# Allegro board PSU-B1-1.brd
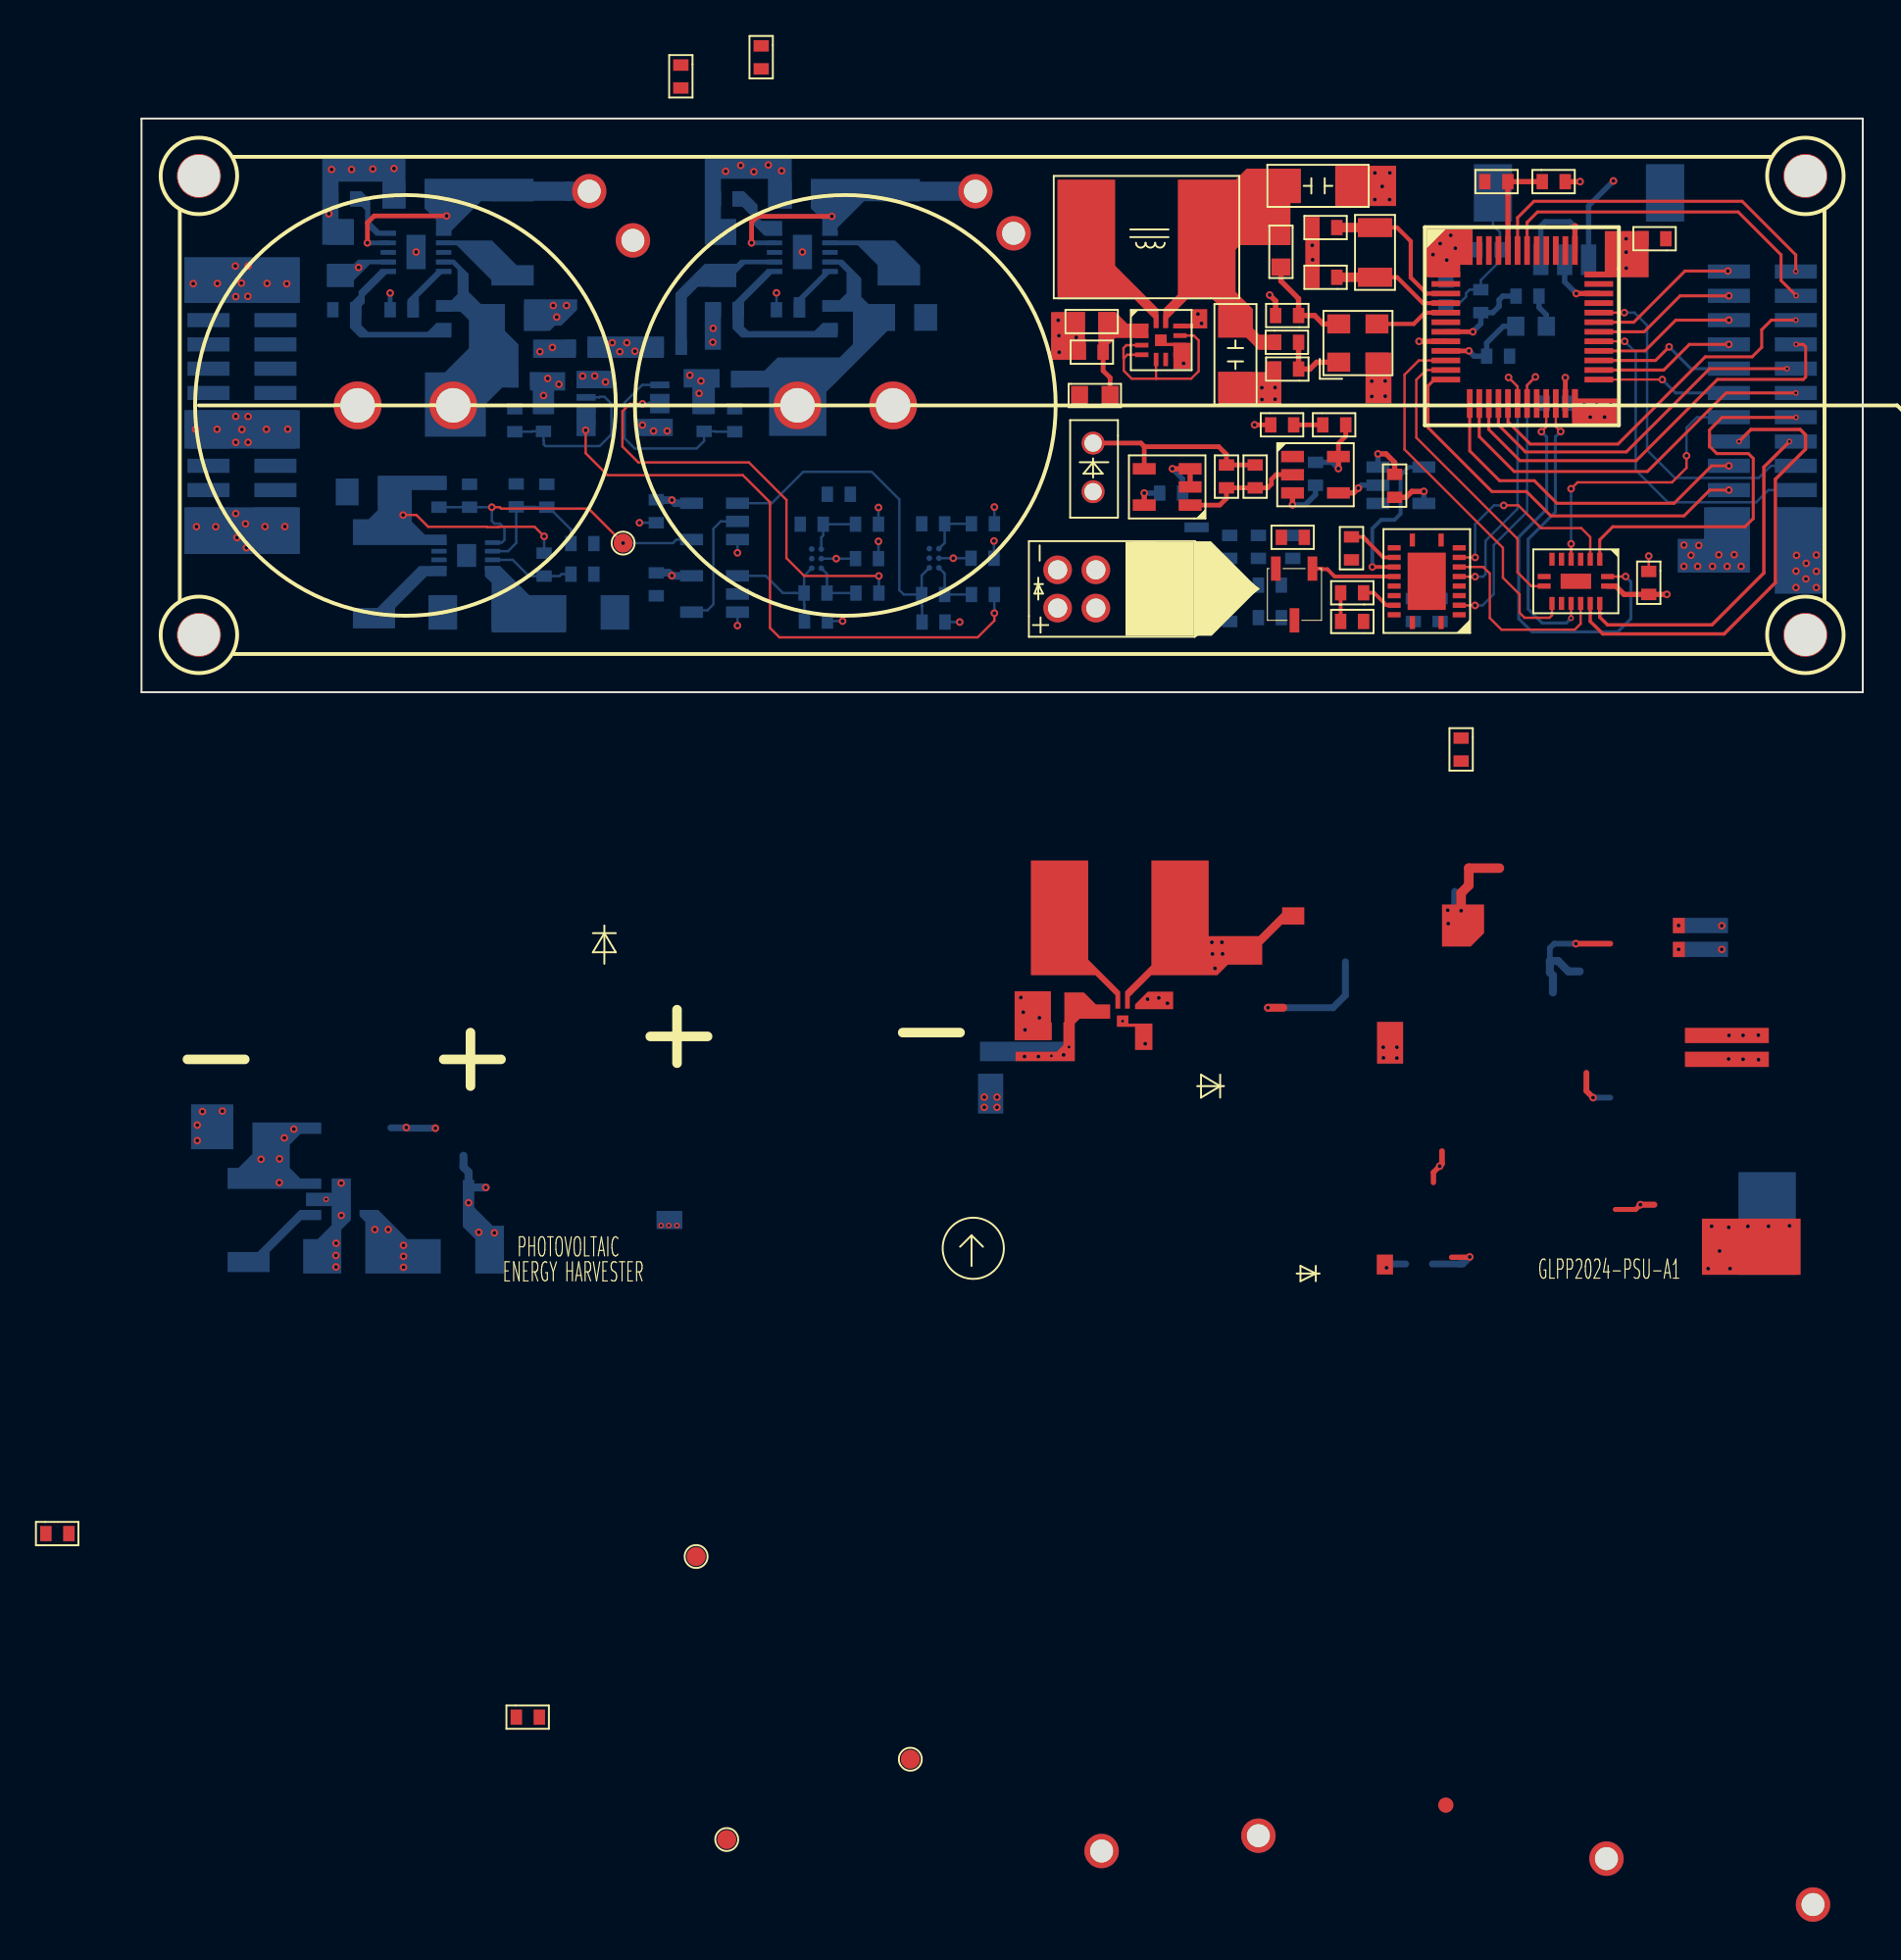
[diagram p0: board, top side]
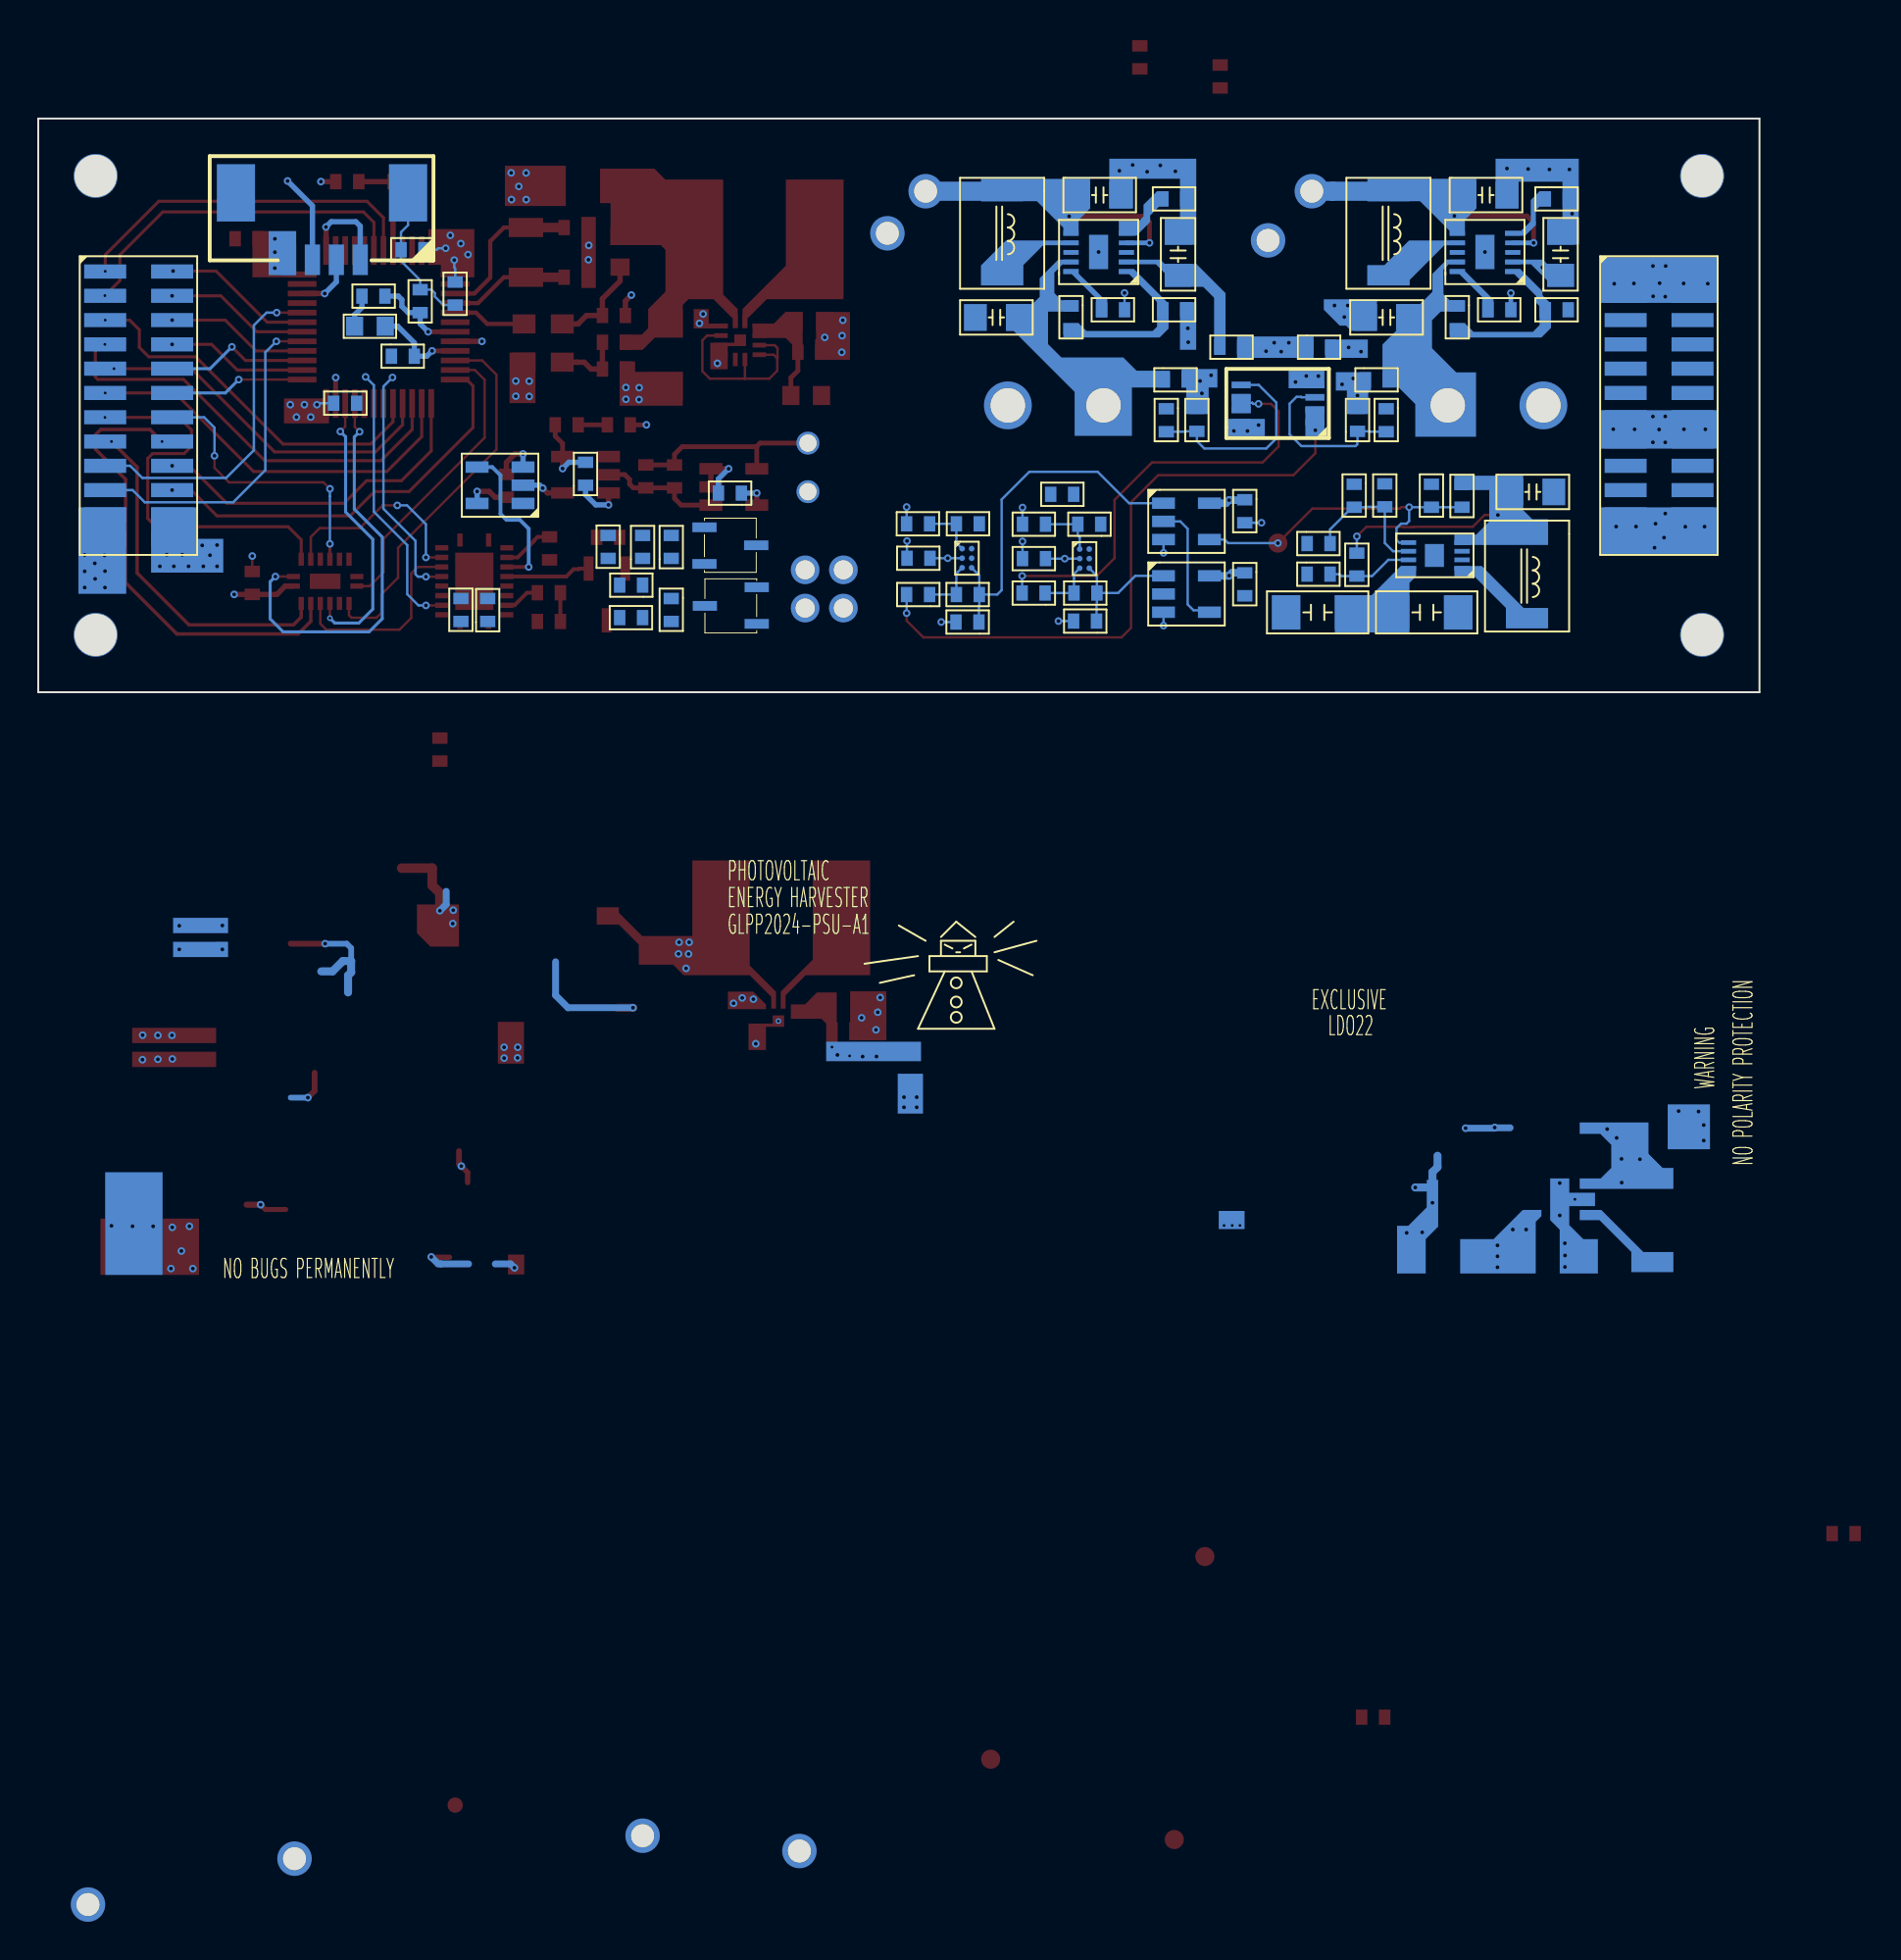
[diagram p1: board, bottom side, seen from below]

Outline 90 x 30 mm; copper layers: TOP, GND, VCC, BOTTOM. Coordinates in mm from the lower left corner of the outline.
Outline path: 0,30 90,30 90,0 0,0 0,30

## Design rules (mm)
constraint set DEFAULT: min track width 0.127
net group N478267: nets N478267 N478271
net group N485107: nets N485107 N485115
net group TX_PWR_EN: nets N478365 TX_PWR_EN
net group VCAP1: nets N478345 VCAP1
net group VCAP2: nets N485373 VCAP2
net group BOOST_EN: nets BOOST_EN N478287 N479043 N490401 N490405 VCAP
net group CHG_FULL: nets CHG_FULL LDO22 N490413 N490465 N490853 N490915 N491089 N491653 UV_SHDN
net group FIBER_TX_3V3: nets FIBER_TX_3V3 N527048 N527198 N527202 N527222
net group P1V8: nets N517140 N518111 N602776 P1V8

## Placement (name value [footprint] x y rotation side)
C1  0.1uF  [C0402]  68.2 20.25 90 bottom
C2  12pF  [C0402]  62.5 24.3 180 top
C3  33uF  [C1206]  63.17 26.48 180 top
C4  12pF  [C0402]  62.5 21.7 180 top
C5  0.1uF  [C0402]  60.5 19.7 180 top
C6  10uF  [C0603]  50.48 19.38 180 top
C7  0.1uF  [C0402]  50.28 17.78 180 top
C8  4.2V/1F  [SUC_THR_5D0_21D5]  13.8 15 180 top
C9  4.2V/1F  [SUC_THR_5D0_21D5]  36.8 15 0 top
C10  DNI  [C0402]  58.23 10.69 90 top
C11  0.1uF  [C0402]  69 -2.4 270 top
C12  0.1uF  [C0402]  78.81 6.32 270 top
C13  0.1uF  [C0402]  71.03 23.14 180 bottom
C14  10uF  [C0805]  35.6 26 180 bottom
C15  10uF  [C0805]  15.4 26 180 bottom
C16  10uF  [C0805]  30.4 21.8 90 bottom
C17  10uF  [C0805]  10.4 21.8 90 bottom
C18  0.1uF  [C0402]  70.03 19.85 90 bottom
C19  0.1uF  [C0402]  79.7 23.72 180 top
C20  1uF  [C0402]  34.4 20 180 bottom
C21  1uF  [C0402]  14.2 20 180 bottom
C22  10uF  [C0805]  38.8 19.6 0 bottom
C23  10uF  [C0805]  18.4 19.6 0 bottom
C24  0.1uF  [C0402]  71.53 17.57 180 bottom
C25  0.1uF  [C0402]  73.35 15.12 0 bottom
C26  0.1uF  [C0402]  65.52 11.39 270 top
C27  0.1uF  [C0402]  61.38 10.82 90 bottom
C28  0.1uF  [C0402]  35.86 10.35 0 bottom
C29  2.2uF  [C0402]  44.59 8.81 180 bottom
C30  10uF  [C0805]  12.95 10.47 180 bottom
C31  33pF  [C0402]  21.19 10.87 270 bottom
C32  0.1uF  [C0402]  53.23 10.41 0 bottom
C33  0.1uF  [C0402]  26.91 10.06 270 bottom
C34  0.1uF  [C0402]  26.91 6.24 270 bottom
C35  2.2uF  [C0402]  38.53 8.79 180 bottom
C36  0.1uF  [C0402]  44.57 7.01 180 bottom
C37  0.1uF  [C0402]  38.53 6.99 180 bottom
C38  0.1uF  [C0402]  67.9 4.9 270 bottom
C39  0.1uF  [C0402]  66.5 3.7 90 bottom
C40  22uF  [C1206]  21.45 4.17 0 bottom
C41  22uF  [C1206]  19.05 4.17 180 bottom
C42  33uF  [C1206]  57.2 16 90 top
D1  GREEN LED  [LED0402]  32.4 33.8 270 top
D2  GREEN LED  [LED0402]  59.04 13.98 0 top
D3  GREEN LED  [LED0402]  63.9 3.7 180 top
D7  LED  [LED0402]  -5 -44 0 top
J2  SIP-1x4  [SMD-1D25-4P-DEG0]  73.16 22.62 0 bottom
J5  CONN-24P  [SMD_CONN_2X12P_1D27]  3.5 22 270 bottom
J6  CONN-24P  [SMD_CONN_2X12P_1D27]  83 22 270 bottom
L1  33uH/1A  [IND_SMD_7D0X6D6]  55.7 23.8 180 top
L2  2.2uH  [L0603]  59.58 23.83 270 top
L3  10uH/1A  [IND_SMD_4D4X4D2]  39.6 26.2 270 bottom
L4  10uH/1A  [IND_SMD_4D4X4D2]  19.4 26.2 270 bottom
L5  2.2uH  [L0603]  73.46 19.14 180 bottom
L6  2.2uH/500mA  [L0603]  49.05 15.52 0 top
L7  4.7uH/1A  [IND_SMD_4D4X4D2]  12.15 8.27 270 bottom
LD1  LaserDiode  [AXIAL_2D0_4P]  47.9 4.4 90 top
NOREF  -  [unnamed]  3 3 0 top
NOREF#2  -  [#2]  0 0 90 top
NOREF#3  -  [unnamed]  3 27 0 top
NOREF#4  -  [unnamed]  87 27 0 top
NOREF#5  -  [#2]  0 30 0 top
NOREF#6  -  [unnamed]  87 3 0 top
PD1  Photodiode  [PD-THR-2P]  49.76 13.03 270 top
Q1  Si2301BDS-HXY  [SOT23-3]  61.7 6.9 180 top
Q2  2SC1815  [SOT23-3]  55.6 9.1 270 bottom
Q3  2SC1815  [SOT23-3]  52 3.1 90 bottom
R1  DNI  [R0402]  28.2 32.8 270 top
R2  DNP  [R0402]  59.3 18.3 0 top
R3  0R  [R0402]  60.5 16.9 180 top
R4  20K  [R0402]  61.77 13.98 0 top
R5  DNI  [R0402]  56.73 10.69 90 top
R6  10K  [R0402]  59.6 8.1 0 top
R7  5.1K  [R0402]  63.27 8.12 270 top
R8  20K  [R0402]  63.9 5.2 180 top
R9  200K  [R0402]  31.2 25.8 180 bottom
R10  200K  [R0402]  11.2 25.8 180 bottom
R11  10K  [R0402]  71.87 20.71 0 bottom
R12  1M  [R0402]  31.2 20 180 bottom
R13  1M  [R0402]  11.2 20 180 bottom
R14  2.26M  [R0402]  36 20.2 270 bottom
R15  2.26M  [R0402]  15.8 20.2 270 bottom
R16  0R  [R0402]  31.12 16.34 180 bottom
R17  0R  [R0402]  20.61 16.34 180 bottom
R18  1M  [R0402]  31.02 14.82 270 bottom
R19  1M  [R0402]  29.42 13.64 90 bottom
R20  1M  [R0402]  21.02 13.64 90 bottom
R21  1M  [R0402]  19.52 14.82 270 bottom
R22  3.3K  [R0402]  40.79 8.81 0 bottom
R23  1M  [R0402]  19.59 9.69 90 bottom
R24  100K  [R0402]  17.15 10.87 270 bottom
R25  DNI  [R0402]  15.55 9.67 90 bottom
R26  22.9K?  [R0402]  34.66 3.72 0 bottom
R27  3.3K  [R0402]  34.44 8.79 0 bottom
R28  378K?  [R0402]  40.81 3.67 0 bottom
R29  562K  [R0402]  23.65 7.77 180 bottom
R30  560  [R0402]  60.2 8.2 270 bottom
R31  510  [R0402]  58.4 7 90 bottom
R32  51  [R0402]  56.9 7 90 bottom
R33  200K  [R0402]  43.39 5.11 0 bottom
R34  998K?  [R0402]  41.99 5.11 180 bottom
R35  DNI  [R0402]  21.05 6.07 90 bottom
R36  100K  [R0402]  23.65 6.17 180 bottom
R37  510  [R0402]  58.4 5.6 0 bottom
R38  3.01K  [R0402]  37.35 5.19 0 bottom
R39  4.99K  [R0402]  35.84 5.19 180 bottom
R40  51  [R0402]  56.9 4.9 270 bottom
R41  510  [R0402]  59.6 3.9 180 bottom
R42  DNP  [R0402]  23.62 18.04 180 bottom
R43  0R  [R0402]  27.02 18.04 0 bottom
R44  0R  [R0402]  73.24 26.7 0 top
R45  DNI  [R0402]  71.44 26.7 180 top
R46  2K  [R0402]  19.6 -53.6 0 top
TP1  Solar Cell V+  [TP_THR_1D8_1D2]  43.6 26.2 180 bottom
TP2  Solar Cell V+  [TP_THR_1D8_1D2]  23.41 26.2 180 bottom
TP3  Solar Cell V-  [TP_THR_1D8_1D2]  45.6 24 180 bottom
TP4  Solar Cell V-  [TP_THR_1D8_1D2]  25.69 23.63 180 bottom
TP7  T POINT S  [TP_SMD_1D0_NP]  29 -45.2 0 top
TP8  T POINT S  [TP_SMD_1D0_NP]  30.6 -60 0 top
TP9  T POINT S  [TP_SMD_1D0_NP]  25.18 7.8 0 top
TP10  T POINT S  [TP_SMD_1D0_NP]  40.2 -55.8 0 top
TP11  T POINT R  [TP_THR_1D8_1D2]  50.2 -60.6 0 top
TP12  T POINT R  [TP_THR_1D8_1D2]  58.4 -59.8 0 top
TP23  T POINT A  [TP_SMD_CIR_0D8_NP]  68.2 -58.2 0 top
TP24  T POINT R  [TP_THR_1D8_1D2]  76.6 -61 0 top
TP25  T POINT R  [TP_THR_1D8_1D2]  87.4 -63.4 0 top
U1  STM32L051C8T6  [LQFP-48]  72.2 19.1 270 top
U2  LTC3336EV#TRPBF  [LQFN-12-2D0X2D0MM]  53.3 18.4 0 top
U3  SN74AHC1G14DBVR  [SOT-23-5]  60.18 12.32 0 top
U4  SN74AHC1G14DBVR  [SOT-23-5]  64.65 9.87 0 bottom
U5  TLV365DBVR  [SOT-23-5]  54.83 9.79 180 top
U6  TMUX1309BQBR  [WQFN-16-3D5X2D5MM]  75 5.8 180 top
U7  TXS0108ERGYR  [VQFN-20]  67.2 5.8 90 top
U8  LTC3105EDD#PBF  [DFN-10]  36 22 90 bottom
U9  LTC3105EDD#PBF  [DFN-10]  15.8 22 90 bottom
U10  ADA4051-2ARMZ  [MSOP-8]  26.86 14.12 90 bottom
U11  ADCMP380-1ACBZ-RL7  [WLCSP-6]  41.69 7.51 180 bottom
U12  ADCMP380-1ACBZ-RL7  [WLCSP-6]  35.54 7.49 180 bottom
U13  SN74LVC1G32DBVR  [SOT-23-5]  31.16 6.09 180 bottom
U14  SN74AUP1G08DBVR  [SOT-23-5]  31.16 9.88 180 bottom
U15  LTC3539EDCB#PBF  [DFN-8]  18.35 6.47 90 bottom
Y1  32.768KHz  [SMD3215-2P]  64.5 24.3 270 top
Y2  32.0MHz_X1G0041710040  [SMD2520-4P]  63.6 18.3 0 top

## Library data of the parts
C1-C7 C10-C13 C19 C25-C27 C32-C34 C38 C39 C42 = CAP NP
C8 C9 C14-C18 C22-C24 C30 = CAP NP: signal model: DEFAULT_CAPACITOR_1e+07pF_2_1
C20 C21 = CAP NP: signal model: DEFAULT_CAPACITOR_1e+06pF_2_1
C28 C36 C37 = CAP NP: signal model: DEFAULT_CAPACITOR_100000pF_2_1
C29 C35 = CAP NP: signal model: DEFAULT_CAPACITOR_2.2e+06pF_2_1
C31 = CAP NP: signal model: DEFAULT_CAPACITOR_33.000000pF_2_1
C40 C41 = CAP NP: signal model: DEFAULT_CAPACITOR_2.2e+07pF_2_1
D1-D3 D7 = LED
J2 = SIP-1x4
J5 J6 = CONN-24P
L1 L2 L6 = INDUCTOR
L3 L4 = INDUCTOR: signal model: DEFAULT_INDUCTOR_10000nH_2_1
L5 L7 = INDUCTOR: signal model: DEFAULT_INDUCTOR_4700nH_2_1
LD1 = LaserDiode
PD1 = Photodiode
Q1 = FH3415A
Q2 Q3 = 2SC1815
R1-R5 R8 R16 R17 R42 R43 R46 = R
R6 R24-R26 R28 R35 R36 = R: signal model: DEFAULT_RESISTOR_10000OHM_2_1
R7 R30 R31 R37 R41 = R: signal model: DEFAULT_RESISTOR_510.000000OHM_2_1
R9 R10 = R: signal model: DEFAULT_RESISTOR_200000OHM_2_1
R11-R13 R18-R21 R23 R44 R45 = R: signal model: DEFAULT_RESISTOR_0.001OHM_2_1
R14 R15 = R: signal model: DEFAULT_RESISTOR_0.00226OHM_2_1
R22 R27 = R: signal model: DEFAULT_RESISTOR_3300OHM_2_1
R29 = R: signal model: DEFAULT_RESISTOR_562000OHM_2_1
R32 R40 = R: signal model: DEFAULT_RESISTOR_40.000000OHM_2_1
R33 R38 = R: signal model: DEFAULT_RESISTOR_36000OHM_2_1
R34 R39 = R: signal model: DEFAULT_RESISTOR_147000OHM_2_1
TP1-TP4 TP23 = T POINT A
TP7-TP10 = T POINT S
TP11 TP12 TP24 TP25 = T POINT R
U1 = STM32L051C8T6
U2 = LTC3336
U3 U4 = SN74AHC1G14DBVR
U5 = TLV365DBVR
U6 = TMUX1309
U7 = TXS0108ERGYR
U8 U9 = LTC3105EDD#PBF
U10 = ADA4051-2ARMZ
U11 U12 = ADCMP380-1ACBZ-RL7
U13 = SN74LVC1G32DBVR
U14 = SN74AUP1G08
U15 = LTC3539EDCB#PBF
Y1 = CRYSTAL
Y2 = OSCILLATOR

## Footprints (pads in the part's own frame, mm; a bottom-side part is the same pattern mirrored in y, then rotated)
AXIAL_2D0_4P
  round 1.5 hole 1: 1(0,0) 2(2,0) 3(0,-2) 4(2,-2)
C0402
  rect 0.6x0.8 smd: 1(0,0) 2(1.2,0)
C0603
  rect 0.9x1 smd: 1(0,0) 2(1.6,0)
C0805
  rect 1.2x1.4 smd: 1(0,0) 2(2.2,0)
C1206
  rect 1.5x1.8 smd: 1(0,0) 2(3.3,0)
DFN-8
  rect 0.25x0.8 smd: 1(0,-2.8) 2(0.45,-2.8) 3(0.9,-2.8) 4(1.35,-2.8) 5(1.35,0) 6(0.9,0) 7(0.45,0) 8(0,0)
  rect 1.2x1 smd: 9(0.676,-1.355)
DFN-10
  rect 0.25x0.8 smd: 1(0,-2.9) 2(0.5,-2.9) 3(1,-2.9) 4(1.5,-2.9) 5(2,-2.9) 6(2,0) 7(1.5,0) 8(1,0) 9(0.5,0) 10(0,0)
  rect 1.8x1 smd: 11(1.022,-1.444)
IND_SMD_4D4X4D2
  rect 1.05x2.2 smd: 1(0,0) 2(4.4,0)
IND_SMD_7D0X6D6
  rect 3x6 smd: 1(0,0) 2(6.3,0)
L0603
  rect 0.9x1 smd: 1(0,0) 2(1.6,0)
LED0402
  rect 0.6x0.8 smd: 1(0,0) 2(1.2,0)
LQFN-12-2D0X2D0MM
  rect 0.7x0.25 smd: 1(-1,0.75) 2(-1,0.25) 3(-1,-0.25) 4(-1,-0.75) 7(1,-0.75) 8(1,-0.25) 9(1,0.25) 10(1,0.75)
  rect 0.25x0.7 smd: 5(-0.25,-1) 6(0.25,-1) 11(0.25,1) 12(-0.25,1)
  rect 0.6x0.6 smd: 13(0,0)
LQFP-48
  rect 0.3x1.5 smd: 1(-2.75,-4) 2(-2.25,-4) 3(-1.75,-4) 4(-1.25,-4) 5(-0.75,-4) 6(-0.25,-4) 7(0.25,-4) 8(0.75,-4) 9(1.25,-4) 10(1.75,-4) 11(2.25,-4) 12(2.75,-4) 25(2.75,4) 26(2.25,4) 27(1.75,4) 28(1.25,4) 29(0.75,4) 30(0.25,4) 31(-0.25,4) 32(-0.75,4) 33(-1.25,4) 34(-1.75,4) 35(-2.25,4) 36(-2.75,4)
  rect 1.5x0.3 smd: 13(4,-2.75) 14(4,-2.25) 15(4,-1.75) 16(4,-1.25) 17(4,-0.75) 18(4,-0.25) 19(4,0.25) 20(4,0.75) 21(4,1.25) 22(4,1.75) 23(4,2.25) 24(4,2.75) 37(-4,2.75) 38(-4,2.25) 39(-4,1.75) 40(-4,1.25) 41(-4,0.75) 42(-4,0.25) 43(-4,-0.25) 44(-4,-0.75) 45(-4,-1.25) 46(-4,-1.75) 47(-4,-2.25) 48(-4,-2.75)
MSOP-8
  rect 0.35x1 smd: 1(-0.001,-3.615) 2(0.649,-3.615) 3(1.299,-3.615) 4(1.949,-3.615) 5(1.949,0.241) 6(1.299,0.241) 7(0.649,0.241) 8(-0.001,0.241)
PD-THR-2P
  round 1.2 hole 0.9: 1(0,0) 2(2.54,0)
R0402
  rect 0.6x0.8 smd: 1(0,0) 2(1.2,0)
SMD2520-4P
  rect 1.2x1 smd: 1(-1,-1.04) 2(1,-1.04) 3(1,0.96) 4(-1,0.96)
SMD3215-2P
  rect 1x1.8 smd: 1(0,0) 2(2.6,0)
SMD-1D25-4P-DEG0
  rect 0.8x1.6 smd: 1(0,0) 2(1.25,0) 3(2.5,0) 4(3.75,0)
  rect 2x3 smd: 5(6.5,-3.5) 6(-2.5,-3.5)
SMD_CONN_2X12P_1D27
  rect 0.74x2.2 smd: 1(0,-3.5) 2(1.27,-3.5) 3(2.54,-3.5) 4(3.81,-3.5) 5(5.08,-3.5) 6(6.35,-3.5) 7(7.62,-3.5) 8(8.89,-3.5) 9(10.16,-3.5) 10(11.43,-3.5) 11(12.7,-3.5) 12(13.97,-3.5) 13(13.97,0) 14(12.7,0) 15(11.43,0) 16(10.16,0) 17(8.89,0) 18(7.62,0) 19(6.35,0) 20(5.08,0) 21(3.81,0) 22(2.54,0) 23(1.27,0) 24(0,0)
SOT23-3
  rect 0.51x1.27 smd: 1(0.476,0.434) 2(2.391,0.434) 3(1.415,3.142)
SOT-23-5
  rect 1.2x0.6 smd: 1(0,0) 2(0,-0.95) 3(0,-1.9) 4(2.4,-1.9) 5(2.4,0)
SUC_THR_5D0_21D5
  round 2.5 hole 1.8: 1(-2.5,0) 2(2.5,0)
TP_SMD_1D0_NP
  round 1 smd: 1(0,0)
TP_SMD_CIR_0D8_NP
  round 0.8 smd: 1(0,0)
TP_THR_1D8_1D2
  round 1.8 hole 1.2: 1(0,0)
unnamed
  round 2.3 hole 2.2 unplated: (0,0)
VQFN-20
  rect 0.68x0.28 smd: 1(-2.157,-0.75) 10(2.158,-0.75) 11(2.158,0.75) 20(-2.157,0.75)
  rect 0.28x0.68 smd: 2(-1.75,-1.7) 3(-1.25,-1.7) 4(-0.75,-1.7) 5(-0.25,-1.7) 6(0.25,-1.7) 7(0.75,-1.7) 8(1.25,-1.7) 9(1.75,-1.7) 12(1.75,1.7) 13(1.25,1.7) 14(0.75,1.7) 15(0.25,1.7) 16(-0.25,1.7) 17(-0.75,1.7) 18(-1.25,1.7) 19(-1.75,1.7)
  rect 3x2 smd: EPAD(0,0)
WLCSP-6
  round 0.3 smd: A1(0,0) A2(0.5,0) B1(0,-0.5) B2(0.5,-0.5) C1(0,-1) C2(0.5,-1)
WQFN-16-3D5X2D5MM
  rect 0.68x0.28 smd: 1(-1.658,-0.25) 8(1.657,-0.25) 9(1.657,0.25) 16(-1.658,0.25)
  rect 0.28x0.68 smd: 2(-1.25,-1.158) 3(-0.75,-1.158) 4(-0.25,-1.158) 5(0.25,-1.158) 6(0.75,-1.158) 7(1.25,-1.158) 10(1.25,1.157) 11(0.75,1.157) 12(0.25,1.157) 13(-0.25,1.157) 14(-0.75,1.157) 15(-1.25,1.157)
  rect 1.6x0.8 smd: EPAD(0,0)

## Nets
GND: C1.1 C2.2 C3.1 C4.2 C5.2 C6.2 C7.2 C8.2 C9.2 C11.1 C12.1 C13.1 C14.2 C15.2 C16.2 C17.2 C18.2 C19.1 C20.2 C21.2 C22.2 C23.2 C24.1 C25.1 C26.1 C27.1 C28.2 C29.1 C30.2 C32.2 C33.2 C34.2 C35.1 C36.1 C37.1 C38.1 C39.2 C40.2 C41.2 C42.1 D1.1(CATHODE) D2.1(CATHODE) D3.1(CATHODE) D7.1(CATHODE) J2.3 J2.5 J2.6 J5.7 J5.8 J5.17 J5.18 J6.11 J6.12 PD1.2 R3.2 R9.2 R10.2 R12.2 R13.2 R18.1 R21.1 R24.1 R29.1 R30.2 R32.2 R36.1 R41.2 R44.2 TP3.1(TP) TP4.1(TP) TP24.1(TP) TP25.1(TP) U1.8(VSSA) U1.23 U1.35 U1.47 U2.7 U2.8 U2.10 U2.13 U3.3 U4.3 U5.2 U5.3 U6.6 U6.8 U6.EPAD U7.11 U7.EPAD U8.3 U8.11 U9.3 U9.11 U10.4(V-) U11.A2 U11.B2 U12.A2 U12.B2 U13.3 U14.3 U15.2 U15.3 U15.9 Y2.2
P1V8: C1.2 C3.2 C11.2 C12.2 C13.2 C19.2 C25.2 C38.2 C42.2 J2.4 L1.1 L2.1 L5.1 R2.1 R11.2 R45.2 U1.1 U1.24 U1.36 U1.48 U2.11(VOUT) U6.16(VDD) U7.2 U7.10
P3V3: C26.2 C27.2 C31.1 C32.1 C39.1 C40.1 C41.1 J5.1 J5.2 J5.11 J5.12 J5.13 J5.14 J5.23 J5.24 J6.13 J6.14 L6.1 Q1.2(S) R4.2 R6.1 R23.2 R46.2 TP11.1(TP) TP12.1(TP) U3.5 U4.5 U5.5 U7.19(VCCB) U15.8(VOUT)
ALL_SHUTDOWN: J5.22 TP23.1(TP)
BOOST_EN: R24.2 R25.1 TP9.1(TP) U14.4(Y) U15.5
CHG_FULL: R26.1 R39.2 TP8.1(TP) U12.C2 U13.1
FIBER_RX: U6.13 U7.7
FIBER_RX_3V3: U4.4(Y) U7.14
FIBER_TX: U6.3 U7.8
FIBER_TX_3V3: R7.1 U7.13
I2C1_SCL: J6.2 U1.42
I2C1_SDA: J6.1 U1.43
IAM_ALIVE: TP7.1(TP) U1.19 U7.3 U13.2
IR_UART_RX: J6.17 U6.14
IR_UART_TX: J6.18 U6.5
LDO22: C28.1 C33.1 C34.1 C36.2 C37.2 R22.1 R26.2 R27.1 R28.2 R42.1 R43.1 U10.8 U11.B1 U12.B1 U13.5 U14.5
LDO22-1: C17.1 R42.2 U9.2
LDO22-2: C16.1 R43.2 U8.2
LPUART1_RX: U1.22 U6.12
LPUART1_TX: U1.21 U6.1
OV_UART_RX: J6.8 U6.15
OV_UART_TX: J6.7 U6.2
PA8: J6.10 U1.29
PA11: J6.9 U1.32
RESERVED1: U1.41
RESERVED2: U1.40
ROUTE_A0: U1.10 U6.10
ROUTE_A1: U1.11 U6.9
SPI1_MISO: J6.5 U1.16
SPI1_MOSI: J6.3 U1.17
SPI1_NSS: J6.6 U1.14
SPI1_SCK: J6.4 U1.15
SPI2_MISO: J6.20 U1.27
SPI2_MOSI: J6.22 U1.28
SPI2_NSS: J6.19 U1.25
SPI2_SCK: J6.21 U1.26
SYS_SWCLK: J2.1 U1.37
SYS_SWDIO: J2.2 U1.34
TX_EN: U1.18 U7.6
TX_PWR_EN: Q1.1 R6.2 U7.15
UN-USED-1: J5.3
UN-USED-2: J5.4
UN-USED-3: J5.5
UN-USED-4: J5.6
UN-USED-5: J5.9
UN-USED-6: J5.10
UN-USED-7: J5.15
UN-USED-8: J5.16
UN-USED-9: J5.19
UN-USED-10: J5.20
UN-USED-11: J5.21
USART1_RX: J6.24 U1.31
USART1_TX: J6.23 U1.30
USART2_RX: J6.16 U1.13
USART2_TX: J6.15 U1.12
UV_SHDN: R28.1 R34.2 TP10.1(TP) U11.C2 U14.1
VCAP: C30.1 L7.1 R1.2 R16.2 R17.1 R19.2 R20.2 R25.2 R35.2 U15.4
VCAP1: C8.1 C23.1 R15.1 R17.2 U9.9(VOUT)
VCAP2: C9.1 C22.1 R14.1 R16.1 U8.9(VOUT)
N478267: C15.1 L4.1 TP2.1(TP) U9.4 U9.6
N478271: L4.2 U9.7
N478287: L7.2 U15.1
N478345: R13.1 R15.2 U9.1
N478365: C31.2 R23.1 R29.2 U15.6
N478369: R10.1 U9.5
N478385: C21.1 U9.10
N479043: R35.1 R36.2 U15.7
N485107: C14.1 L3.1 TP1.1(TP) U8.4 U8.6
N485115: L3.2 U8.7
N485373: R12.1 R14.2 U8.1
N485445: R9.1 U8.5
N485483: C20.1 U8.10
N490401: R18.2 R19.1 U10.5
N490405: R20.1 R21.2 U10.3
N490413: C29.2 R22.2 U11.A1(VCC)
N490465: R33.2 U10.1 U10.2
N490853: R33.1 R34.1 U11.C1
N490915: R38.2 U10.6 U10.7
N490953: U13.4(Y) U14.2
N491089: C35.2 R27.2 U12.A1(VCC)
N491611: C6.1 C7.1 L6.2 U2.1 U2.2
N491653: R38.1 R39.1 U12.C1
N492211: L1.2 U2.12
N492453: U2.3 U2.4 U2.5 U2.9
N504730: C2.1 U1.3 Y1.1
N504882: C4.1 U1.4 Y1.2
N512213: U1.5 Y2.3
N512221: R2.2 R3.1 Y2.1
N512229: C5.1 L2.2 Y2.4(VDD)
N517140: C24.2 L5.2 U1.9
N518111: C18.1 R11.1 U1.7
N527048: LD1.1 Q1.3 R31.1 R37.1 R40.1
N527184: LD1.2 Q2.3
N527198: Q3.1 R7.2 R37.2 R41.1
N527202: Q3.3 R40.2
N527222: Q2.1 R30.1 R31.2
N527434: Q2.2(E) Q3.2(E) R32.1
N541574: D3.2 R8.2
N546758: C10.2 PD1.1 R5.2 U5.4
N546765: C10.1 R5.1 U3.2 U5.1(VOUT)
N549679: U3.4(Y) U4.2
N554827: D2.2 R4.1
N555295: D1.2 R1.1
N563900: R8.1 U7.18
N602776: R44.1 R45.1 U1.44
N742936: D7.2 R46.1

Pads without a net: LD1 3 4; U1 2 6 20 33 38 39 45 46; U2 6; U3 1; U4 1; U6 4 7 11; U7 1 4 5 9 12 16 17 20; U8 8; U9 8

## Via types
v1: diameter 0.4, hole 0.2, TOP to BOTTOM, 261 vias
v2: diameter 0.3, hole 0.15, TOP to BOTTOM, 17 vias

## Routing (per net, layer and track width the routed paths; a pad name or vN(x,y) marks a point on that pad's centre or on a via; arc(x,y) is an arc through that point)
GND: length 37.5
  TOP w0.127: C12.1 v1(78.81,7.12)
  TOP w0.25: v1(74.45,16.45) 74.45,16.45 U1.23 ; D2.1 v1(58.2,13.98)
  TOP w0.28: U5.2 U5.3 v1(53.9,11.69) ; U1.8 v1(66.8,18.35) ; C5.2 59.3,20.46 v1(58.99,20.77) ; v1(64.65,12.46) 65.08,12.46 65.52,12.02 C26.1 ; R44.2 v1(75.22,26.7) ; U3.3 v1(60.18,9.8)
  BOTTOM w0.127: J2.6 70.66,24.42 71.03,24.06 C13.1 71.03,22.55 70.03,21.55 C18.2 69.44,21.05 69.26,20.87 69.26,20.69 68.82,20.25 C1.1 ; C29.1 v1(44.59,9.68) ; C35.1 v1(38.53,9.66) ; C20.2 v1(33.2,20.88) ; C37.1 v1(38.53,7.89) ; C36.1 v1(44.57,7.91) ; C33.2 v1(26.04,8.86) ; U14.3 v1(31.16,7.29) ; U13.3 v1(31.16,3.48)
  BOTTOM w0.25: C21.2 v1(13,20.88)
  BOTTOM w0.28: v1(60.18,9.8) 60.85,9.8 61.38,10.33 C27.1 ; U4.3 v1(64.65,12.46) ; C32.2 54.44,11.15 v1(53.9,11.69) ; v1(76.96,26.74) 75.66,25.44 J2.3
  BOTTOM w0.42: v1(18,-25.9) 17.1,-25.9 17.1,-25.1 16.84,-24.83 16.84,-24.24
  vias: v1(2.83,13.75) v1(2.92,-22.64) v1(2.92,-23.45) v1(3.19,-21.93) v1(3.95,13.75) v1(4.23,-21.91) v1(4.93,14.42) v1(4.93,13.07) v1(5.25,13.74) v1(5.57,14.42) v1(5.57,13.07) v1(6.53,13.75) v1(7.64,13.75) v1(9.8,25.02) v1(9.94,27.34) v1(10.18,-28.82) v1(10.17,-29.46) v1(10.17,-30.06) v1(10.44,-25.67) v1(10.45,-27.36) v1(10.98,27.34) v1(12.1,27.36) v1(13.2,27.39) v1(14.36,23.02) v1(17.1,-26.7) v1(17.63,-28.25) v1(18.45,-28.27) v1(21.53,20.22) v1(21.71,19.62) v1(22.22,20.22) v1(23.07,16.53) v1(23.7,16.54) v1(24.26,16.22) v1(29.89,19.03) v1(29.87,18.3) v1(30.54,27.24) v1(31.33,27.55) v1(32.02,27.22) v1(32.78,27.57) v1(33.47,27.27) v1(34.56,23.02) v1(45.98,-15.97) v1(46.1,-16.74) v1(46.2,-17.66) v1(46.95,-17.03) v1(47.93,19.45) v1(47.97,18.64) v1(47.99,17.78) v1(48.87,18.56) v1(52.48,-18.38) v1(52.61,-16.05) v1(53.19,-15.99) v1(53.64,-16.27) v1(54.49,17.2) v1(55.24,19.78) v1(55.43,19.29) v1(58.58,15.92) v1(58.58,15.31) v1(59.27,15.94) v1(59.27,15.32) v1(61.21,23.37) v1(61.23,22.62) v1(64.33,16.27) v1(64.33,15.47) v1(64.49,27.16) v1(64.49,25.76) v1(64.87,26.45) v1(64.93,-18.57) v1(64.94,-19.12) v1(65.03,16.27) v1(65.03,15.48) v1(65.27,27.16) v1(65.26,25.76) v1(65.64,-18.57) v1(65.64,-19.13) v1(80.37,-13.45) v1(81.92,-30.14) v1(82.1,-27.93) v1(82.52,-29.22) v1(82.63,-13.45) v1(83.01,-17.95) v1(82.99,-27.98) v1(83.06,-30.14) v1(83.74,-17.95) v1(83.99,-27.93) v1(84.54,-17.94) v1(85.07,-27.93) v1(86.17,-27.9) v1(86.54,7.16) v1(86.51,6.33) v1(86.51,5.47) v1(87.04,6.74) v1(87.03,5.93) v1(87.57,7.18) v1(87.57,6.32) v1(87.57,5.47) v2(9.65,-26.52) v2(27.16,-27.89) v2(27.57,-27.89) v2(28,-27.89) v2(51.3,-17.2)
P1V8: length 99.7
  TOP w0.127: C42.2 57.35,19.3
  TOP w0.26: 77.06,-27.05 78.12,-27.05 v1(78.37,-26.8)
  TOP w0.28: U6.16 77.08,5.55 77.52,5.11 C12.2 v1(79.76,5.11) ; v1(69.45,-29.53) 69.43,-29.55 68.5,-29.55 ; 67.55,-25.64 67.55,-25.11 v1(67.88,-24.78)
  TOP w0.3: v1(75,-13.15) 76.8,-13.15 ; v1(75.9,-21.2) 75.55,-20.85 75.55,-19.9 ; v1(67.88,-24.78) 68,-24.66 68,-24
  TOP w0.32: 79.1,-26.8 v1(78.37,-26.8)
  TOP w0.42: 59.7,-16.5 v1(58.9,-16.5)
  TOP w0.5: v1(69,-11.43) 69,-10.5 69.4,-10.1 69.4,-9.2 71,-9.2
  VCC w0.127: 69.61,-24.1 70.15,-24.64 70.15,-28.84 v1(69.45,-29.53) ; 69.61,-24.1 68.93,-24.78 v1(67.88,-24.78) ; 69.61,-24.1 70.53,-23.19 75.84,-23.19 77,-22.03 77,-21.78 ; 77,-21.78 78.37,-23.15 v1(78.37,-26.8) ; 77,-21.78 77,-20.61 75.9,-19.51 ; 75.9,-19.51 75.9,-15.65 74.34,-14.09 73.43,-14.09 73.26,-13.92 ; 75.9,-19.51 v1(75.9,-21.2) ; v1(58.9,-16.5) 59.35,-16.5 60.09,-15.76 60.09,-14.87 59.01,-13.79 56.97,-13.79 56.6,-14.16 56.4,-14.16 v1(56.13,-14.44) ; v1(56.49,-13.08) 56.95,-13.54 59.15,-13.54 61.29,-11.4 v1(68.3,-11.4) ; 73.26,-13.92 70.19,-13.92 69,-12.73 v1(69,-11.43) ; 73.26,-13.92 74.03,-13.15 v1(75,-13.15)
  VCC w0.3: 74.7,-13.8 74.7,-13.45 v1(75,-13.15)
  BOTTOM w0.127: C13.2 69.17,23.14 69.09,23.22 v1(68.7,23.22) ; v1(75.43,15.04) 75.35,15.12 C25.2 ; C1.2 68.2,22.16 68.25,22.21 v1(68.25,22.6)
  BOTTOM w0.28: L5.1 73.46,19.74 73.07,20.12 73.07,20.71
  BOTTOM w0.3: 76.8,-21.2 75.94,-21.2 v1(75.9,-21.2) ; 73.64,-14.06 73.64,-13.38 73.87,-13.15 v1(75,-13.15)
  BOTTOM w0.36: 68.67,-10.42 68.67,-11.09 v1(69,-11.43) ; 62.95,-14.1 62.95,-15.85 62.3,-16.5 v1(58.9,-16.5) ; 67.5,-29.9 68.95,-29.9 68.96,-29.89 69.09,-29.89 v1(69.45,-29.53)
  BOTTOM w0.42: 75.2,-14.6 74.61,-14.6 74.07,-14.06 73.64,-14.06 73.64,-14.65 73.8,-14.81 73.8,-15.7
  vias: v1(55.97,-13.08) v1(56,-13.69) v1(56.52,-13.68) v1(67.53,22.89) v1(67.91,23.46) v1(68.33,-12.1) v1(68.45,23.89) v1(75.75,14.39) v1(76.08,15.04) v1(76.5,14.39) v1(76.82,15.04) v1(77.63,23.71) v1(77.63,23.01) v1(77.63,22.18)
P3V3: length 10.9
  TOP w0.25: U3.5 62.58,13.01 62.97,13.39 R4.2
  TOP w0.28: U5.5 v1(52.43,10.41) ; v1(67.05,10.5) 66.42,10.5 66.11,10.19 C26.2 ; U3.5 v1(62.58,11.7)
  BOTTOM w0.28: v1(62.58,11.7) 62.26,12.02 C27.2 ; C32.1 52.43,10.41 v1(52.43,10.41) ; U4.5 v1(67.05,10.5)
  BOTTOM w0.36: v1(15.37,-22.8) 13.88,-22.8 v1(13.85,-22.77) 13.83,-22.78 13.04,-22.78 ; v1(65.1,-30.1) 65.3,-29.9 66.1,-29.9
  vias: v1(2.7,21.37) v1(2.87,8.66) v1(3.88,8.66) v1(3.97,21.38) v1(4.9,22.29) v1(4.93,20.69) v1(4.93,9.34) v1(4.99,8.09) v1(5.22,21.39) v1(5.43,8.81) v1(5.49,7.56) v1(5.57,22.29) v1(5.56,20.71) v1(6.46,8.66) v1(6.57,21.38) v1(7.5,8.66) v1(7.59,21.36) v1(12.2,-28.1) v1(12.9,-28.1) v1(13.7,-28.93) v1(13.7,-29.5) v1(13.7,-30.07) v1(44.07,-21.18) v1(44.07,-21.71) v1(44.73,-21.18) v1(44.73,-21.71) v1(80.37,-12.2) v1(80.65,7.7) v1(80.65,6.58) v1(81.02,7.16) v1(81.43,7.68) v1(81.37,6.58) v1(82.14,6.58) v1(82.47,7.19) v1(82.63,-12.21) v1(82.91,6.58) v1(82.99,-19.18) v1(83.28,7.19) v1(83.64,6.58) v1(83.74,-19.2) v1(84.55,-19.22)
BOOST_EN: length 16.9
  TOP w0.127: v1(25.18,7.8) 23.38,9.6 18.8,9.6 18.73,9.68 v1(18.32,9.68)
  BOTTOM w0.127: 28.76,7.98 27.97,7.98 27.78,7.8 v1(25.18,7.8) ; R25.1 R24.2 17.74,9.67 17.75,9.68 v1(18.32,9.68) 18.32,8.95 18.45,8.82 18.74,8.82 18.98,8.58 18.98,7.97 18.84,7.82 U15.5
CHG_FULL: length 6.8
  BOTTOM w0.127: U12.C2 34.64,6.09 R39.2 ; R39.2 34.15,5.19 34.15,5.19 33.53,5.19 32.64,6.09 U13.1 ; R39.2 34.64,4.6 34.66,4.58 R26.1
FIBER_RX: length 10.3
  TOP w0.127: U7.7 70.16,6.55 70.5,6.21 70.5,3.88 71.11,3.27 74.94,3.27 75.25,3.58 U6.13
FIBER_RX_3V3: length 8.4
  TOP w0.2: U7.14 v1(64.36,6.55)
  BOTTOM w0.2: v1(64.36,6.55) 64.36,8.55 64.82,9.02 65.52,9.02 65.83,9.33 65.83,11.35 66.26,11.77 U4.4
FIBER_TX: length 10.8
  TOP w0.127: U6.3 75.75,8.11 75.28,8.58 73.18,8.58 72,9.77 v1(71.23,9.77) ; v1(69.73,7.05) U7.8
  BOTTOM w0.127: v1(71.23,9.77) 70.71,9.77 69.73,8.79 v1(69.73,7.05)
FIBER_TX_3V3: length 2.7
  TOP w0.2: U7.13 64.93,7.05 64.07,7.91 64.07,7.94 63.89,8.12 R7.1
I2C1_SCL: length 18.4
  TOP w0.16: v2(86.52,20.74) 85.73,21.53 85.73,22.87 83.49,25.12 73,25.12 72.45,24.57 U1.42
I2C1_SDA: length 18.6
  TOP w0.16: v2(86.5,22.01) 86.5,22.87 83.69,25.67 72.81,25.67 71.95,24.82 U1.43
IAM_ALIVE: length 15.9
  TOP w0.127: U7.3 68.91,4.54 v1(69.73,4.54) ; v1(72.88,16.49) 72.45,16.06 U1.19
  BOTTOM w0.127: v1(72.88,16.49) 72.45,16.06 72.45,9.44 70.7,7.69 70.7,5.12 70.12,4.54 v1(69.73,4.54)
IR_UART_RX: length 24.2
  TOP w0.18: v2(83.53,13.11) 84.16,13.74 86.73,13.74 87.01,13.46 87.01,12.71 85.43,11.13 85.43,5.73 82.75,3.05 76.41,3.05 75.75,3.71 U6.14
IR_UART_TX: length 14.7
  TOP w0.127: v1(74.75,10.64) 75.09,10.98 80.03,10.98 80.79,11.73 v1(80.79,12.36)
  TOP w0.16: v1(74.75,7.76) U6.5
  BOTTOM w0.127: v1(74.75,10.64) 74.75,10.25 74.75,10.25 v1(74.75,7.76) ; v1(80.79,12.36) 80.79,13.84 81.33,14.38 J6.18
LDO22: length 8.9
  BOTTOM w0.127: R26.2 v1(36.66,3.72) ; C37.2 v1(36.33,6.99) U12.B1 ; U11.B1 v1(42.45,7.01) C36.2 ; R28.2 v1(42.78,3.67)
  BOTTOM w0.4: 28.76,9.88 27.89,9.88 v1(27.73,10.05) 26.93,10.05 C33.1 ; C34.1 26.92,6.25 27.58,6.25 v1(27.73,6.1) 27.74,6.09 28.76,6.09
  vias: v1(24.61,18.28) v1(25.01,17.81) v1(25.38,18.28) v1(25.8,17.83) v1(26.19,13.97) v1(26.77,13.66) v1(27.48,13.66)
LDO22-1: length 13.7
  VCC w0.36: v1(11.35,22.21) 11.35,18.2 11.74,17.81 v1(20.83,17.81)
  vias: v1(21.48,18.03)
LPUART1_RX: length 15
  TOP w0.127: U6.12 74.75,4.64 v2(74.75,3.87) ; U1.22 73.95,13.89 v1(74.21,13.63)
  BOTTOM w0.16: v1(74.21,13.63) 73.93,13.36 73.93,9.42 72.5,8 72.5,4.35 73.23,3.62 74.5,3.62 v2(74.75,3.87)
LPUART1_TX: length 21.8
  TOP w0.127: U1.21 73.45,13.88 v1(73.2,13.62) ; v1(77.6,6.05) U6.1
  BOTTOM w0.16: v1(73.2,13.62) 73.47,13.35 73.47,9.58 72.01,8.11 72.01,3.84 72.7,3.16 77.19,3.16 77.88,3.84 77.88,5.77 v1(77.6,6.05)
OV_UART_RX: length 18
  TOP w0.18: v2(86.17,13.11) 84.83,11.77 84.83,6.23 82.12,3.52 76.65,3.52 76.25,3.93 U6.15
OV_UART_TX: length 20.8
  TOP w0.16: U6.2 76.25,7.97 76.93,8.65 83.84,8.65 84.27,9.09 84.27,12.23 84.02,12.48 82.37,12.48 81.99,12.86 81.99,13.72 82.64,14.37 v2(86.51,14.37)
PA8: length 17.7
  TOP w0.127: U1.29 v1(77.55,18.35)
  BOTTOM w0.13: v1(77.55,18.35) 78.13,17.77 78.13,11.61 79.81,9.93 84.43,9.93 85.07,10.57 J6.10
PA11: length 18
  TOP w0.127: U1.32 v1(77.53,19.85)
  BOTTOM w0.13: v1(77.53,19.85) 78.06,19.85 78.72,19.19 78.72,12.66 80.17,11.21 84.56,11.21 85.19,11.84 J6.9
ROUTE_A0: length 19.9
  TOP w0.127: U6.10 73.75,4.02 73.62,3.9 72.31,3.9 72.06,4.15 72.06,5.12 71.18,5.99 71.18,7.55 66.04,12.69 66.04,16.6 66.79,17.35 U1.10
ROUTE_A1: length 15.7
  TOP w0.127: U1.11 67.17,16.85 66.66,16.34 66.66,13.31 71.95,8.02 71.95,6.27 72.67,5.55 U6.9
SPI1_MISO: length 18.6
  TOP w0.16: U1.16 70.95,13.98 72.36,12.57 77.64,12.57 81.99,16.92 v2(86.04,16.92)
SPI1_MOSI: length 19.7
  TOP w0.16: v2(86.5,19.46) 85.22,19.46 84.72,18.95 84.72,18.04 84.22,17.54 81.77,17.54 77.2,12.98 72.62,12.98 71.45,14.14 U1.17
SPI1_NSS: length 20.7
  TOP w0.16: v2(86.5,15.65) 82.85,15.65 78.74,11.54 71.77,11.54 69.95,13.36 U1.14
SPI1_SCK: length 22.5
  TOP w0.16: U1.15 70.45,13.73 72.07,12.11 78.16,12.11 82.4,16.36 86.89,16.36 87.02,16.48 87.02,18.06 86.89,18.19 v2(86.52,18.19)
SPI2_MISO: length 7.6
  TOP w0.16: v1(79.88,18.06) 79.17,17.35 U1.27
  BOTTOM w0.16: J6.20 81.02,16.92 v1(79.88,18.06)
SPI2_MOSI: length 7.5
  TOP w0.16: v1(83,19.46) 80.22,19.46 78.61,17.85 U1.28
SPI2_NSS: length 7.1
  TOP w0.127: v1(79.52,16.35) U1.25
  BOTTOM w0.16: J6.19 80.22,15.65 v1(79.52,16.35)
SPI2_SCK: length 7.4
  TOP w0.16: v1(83,18.19) 80.93,18.19 79.59,16.85 U1.26
SYS_SWCLK: length 5
  TOP w0.28: v1(74.96,24.33) 74.95,24.32 U1.37
  BOTTOM w0.28: J2.1 73.16,24.38 73.39,24.6 74.68,24.6 v1(74.96,24.33)
SYS_SWDIO: length 3.2
  TOP w0.28: U1.34 v1(75.02,20.85)
  BOTTOM w0.28: J2.2 74.41,21.46 v1(75.02,20.85)
TX_EN: length 14.2
  TOP w0.127: U1.18 71.95,15.99 v1(71.48,16.46) ; v1(69.73,6.04) 68.91,6.04 U7.6
  BOTTOM w0.127: v1(71.48,16.46) 71.95,15.99 71.95,9.59 70.28,7.92 70.28,6.17 70.15,6.04 v1(69.73,6.04)
TX_PWR_EN: length 4.4
  TOP w0.2: U7.15 62.39,6.05 62.01,6.43 61.74,6.43 61.71,6.47 Q1.1
USART1_RX: length 7.9
  TOP w0.16: U1.31 78.03,19.35 80.7,22.03 v1(82.95,22.03)
USART1_TX: length 7.6
  TOP w0.16: v1(83,20.73) 80.45,20.73 78.57,18.85 U1.30
USART2_RX: length 18
  TOP w0.16: v1(83,11.84) 82.1,11.84 80.14,9.88 74.01,9.88 72.83,11.06 71.01,11.06 69.45,12.62 U1.13
USART2_TX: length 21.5
  TOP w0.16: U1.12 67.6,16.35 67.27,16.02 67.27,13.84 70.61,10.49 72.42,10.49 73.69,9.22 80.65,9.22 82,10.57 v1(83,10.57)
UV_SHDN: length 18.8
  BOTTOM w0.127: R34.2 40.79,4.52 40.81,4.5 R28.1 ; R34.2 39.86,5.11 39.63,5.34 39.63,10.08 38.18,11.53 34.6,11.53 32.96,9.88 U14.1 ; R34.2 40.79,6.11 U11.C2
VCAP: length 8.7
  TOP w0.127: v1(13.68,9.27) 14.37,9.27 14.99,8.65 18.07,8.65 18.09,8.63 18.64,8.63 18.65,8.65 20.55,8.65 v1(21.05,8.15)
  BOTTOM w0.127: R35.2 v1(21.05,8.15)
  vias: v1(6.25,-24.42) v1(7.21,-24.41) v1(7.21,-25.65) v1(7.47,-23.31) v1(7.96,-22.85) v1(21.02,15.52) v1(21.24,16.41) v1(21.82,16.1) v1(28.67,16.57) v1(29.16,15.63) v1(29.25,16.28)
N478267: length 10.4
  TOP w0.25: v1(15.95,24.91) 12.16,24.91 11.81,24.56 v1(11.81,23.5)
  BOTTOM w0.25: U9.4 v1(11.81,23.5)
  BOTTOM w1: L4.1 22.32,26.2 TP2.1
N478365: length 7.4
  BOTTOM w0.127: R29.2 22.45,8.51 21.29,9.67 C31.2 20.6,9.67 20.58,9.69 R23.1 19.59,7.8 19.16,7.37 U15.6
N479043: length 4.5
  BOTTOM w0.127: U15.7 19.41,6.92 20.26,6.07 R35.1 21.86,6.07 21.96,6.17 R36.2
N485107: length 10.6
  TOP w0.25: v1(31.9,23.5) 31.9,24.57 32.21,24.89 v1(36.1,24.89)
  BOTTOM w0.25: U8.4 v1(31.9,23.5)
  BOTTOM w1: TP1.1 L3.1
N490401: length 10.7
  BOTTOM w0.127: U10.5 26.18,16.07 25.26,15.15 25.26,13.27 25.79,12.75 29.03,12.75 29.42,13.14 R19.1 30.01,13.64 30.03,13.62 R18.2
N490405: length 9.1
  BOTTOM w0.127: U10.3 23.94,15.42 23.96,15.45 24.21,15.45 24.57,15.09 24.57,13.49 23.95,12.87 21.12,12.87 21.03,12.96 21.03,13.14 21.02,13.15 R20.1 20.43,13.64 20.41,13.62 R21.2
N490413: length 2.8
  BOTTOM w0.127: U11.A1 41.99,7.81 R22.2 C29.2
N490465: length 32.1
  TOP w0.127: v1(23.22,13.7) 23.22,12.5 24.37,11.35 31.44,11.35 32.86,9.93 32.86,3.36 33.36,2.87 43.72,2.87 44.59,3.74 v1(44.59,4.14)
  BOTTOM w0.127: v1(44.59,4.14) R33.2
N490853: length 2.9
  BOTTOM w0.127: R33.1 R34.1 41.99,6.2 41.93,6.26 41.93,6.27 U11.C1
N490915: length 22.8
  TOP w0.127: v1(26.2,15.08) 25.54,15.08 25.15,14.69 25.15,12.85 25.98,12.02 31.76,12.02 33.72,10.05 33.72,7.01 34.65,6.08 v1(38.55,6.08)
  BOTTOM w0.127: R38.2 v1(38.55,6.08) ; v1(26.2,15.08) 26.47,15.08 26.52,15.14 27.05,15.14
N490953: length 6.7
  BOTTOM w0.127: U14.2 30.29,8.93 29.9,8.55 29.9,4.59 29.59,4.28 28.86,4.28 28.76,4.19
N491089: length 3
  BOTTOM w0.127: C35.2 R27.2 35.64,8.2 35.54,8.1 U12.A1
N491611: length 2.4
  TOP w0.25: L6.2 50.65,16.45 50.28,16.81 C7.1
  vias: v1(46.17,-19.05) v1(46.89,-19.05) v1(48.21,-18.97) v2(47.58,-19.02) v2(48.5,-18.56)
N491653: length 2.9
  BOTTOM w0.127: U12.C1 35.84,6.19 35.84,5.95 35.84,5.94 R39.1 R38.1
N492453: length 11.2
  TOP w0.127: U2.3 51.5,18.15 51.35,18 51.35,17.48 51.36,17.46 ; 51.36,17.46 51.36,16.81 51.77,16.4 53.05,16.4 ; 51.36,17.46 51.55,17.65 U2.4 ; U2.5 53.05,16.4 53.05,16.4 ; 53.05,16.4 54.88,16.4 55.28,16.79 55.28,18.4 55.03,18.65 U2.9
N504730: length 8.2
  TOP w0.22: Y1.1 65.65,24.3 66.37,23.59 66.37,21.68 67.2,20.85 U1.3
  TOP w0.5: C2.1 Y1.1
N504882: length 6.3
  TOP w0.22: Y1.2 65.65,21.7 67,20.35 U1.4
  TOP w0.5: C4.1 Y1.2
N512213: length 3.8
  TOP w0.22: Y2.3 66.52,19.26 67.11,19.85 U1.5
N512221: length 3.6
  TOP w0.28: R2.2 R3.1 61.09,16.9 61.45,17.26 61.8,17.26 61.81,17.26 Y2.1
N512229: length 5.2
  TOP w0.28: L2.2 59.58,21.5 60.5,20.58 C5.1 61.34,19.7 61.78,19.26 Y2.4
N517140: length 4.8
  TOP w0.25: U1.9 v1(69.41,17.85)
  BOTTOM w0.28: L5.2 71.21,19.14 70.33,18.27 C24.2 69.69,17.57 v1(69.41,17.85)
N518111: length 5
  TOP w0.25: U1.7 v1(69.61,18.85)
  BOTTOM w0.28: R11.1 71.18,20.71 70.99,20.52 70.99,20.18 70.66,19.85 C18.1 70.03,19.27 v1(69.61,18.85)
N541574: length 1.5
  TOP w0.2: R8.2 D3.2
N546758: length 10.4
  TOP w0.25: C10.2 R5.2 56.73,12.44 56.33,12.84 52.45,12.84 ; 52.45,12.84 52.26,13.03 PD1.1 ; 52.45,12.84 52.43,12.82 U5.4
N546765: length 6.5
  TOP w0.25: U5.1 56.38,9.79 56.73,10.13 R5.1 C10.1 58.88,10.69 59.08,10.89 59.08,11.13 59.33,11.38 60.18,11.38 U3.2
N549679: length 2.2
  TOP w0.28: v1(63.62,10.67) 63.37,10.42 U3.4
  BOTTOM w0.28: U4.2 63.78,10.82 v1(63.62,10.67)
N554827: length 1.5
  TOP w0.25: R4.1 D2.2
N563900: length 1.9
  TOP w0.2: U7.18 65.1,4.55 64.45,5.2 R8.1
N602776: length 5.4
  TOP w0.28: R44.1 R45.1 71.44,26.11 71.45,26.1 U1.44

## Copper pours and planes (outline as drawn; the poured copper is in the pictures)
GND on TOP (solid shape): 61.6,21.14 60.85,21.14 60.85,24.86 61.6,24.86
GND on TOP (solid shape): 65.36,15.12 64,15.12 64,17.76 65.36,17.76
GND on TOP (solid shape): 65.6,25.43 62.42,25.43 62.42,27.53 65.6,27.53
GND on TOP (solid shape): 65.97,-19.42 64.6,-19.42 64.6,-17.24 65.97,-17.24
GND on TOP (solid shape): 85.09,-18.35 80.7,-18.35 80.7,-17.55 85.09,-17.55
GND on TOP (solid shape): 86.75,-30.47 81.59,-30.47 81.59,-27.53 86.75,-27.53
GND on TOP (solid shape): 53.94,-16.58 51.95,-16.58 51.95,-16.33 52.62,-15.66 53.94,-15.66
GND on TOP (solid shape): 55.73,19.02 53.95,19.02 53.95,19.27 54.94,19.27 54.94,20.04 55.73,20.04
GND on TOP (solid shape): 59.6,14.98 56.3,14.98 56.3,16.75 58.79,16.75 58.79,17.3 59.6,17.3
GND on TOP (solid shape): 47.55,-17.24 47.6,-17.29 47.6,-18.2 45.65,-18.2 45.65,-15.64 47.55,-15.64
GND on TOP (solid shape): 51.6,-17.33 52.86,-17.33 52.86,-18.71 51.95,-18.71 51.95,-17.5 51,-17.5 51,-16.9 51.6,-16.9
GND on TOP (solid shape): 53.6,18.27 54.86,18.27 54.86,16.89 53.95,16.89 53.95,18.1 53,18.1 53,18.7 53.6,18.7
GND on TOP (solid shape): 49.33,19.88 49.33,18.49 49.38,18.44 49.38,17.38 47.56,17.38 47.56,19.88 47.75,19.88 47.75,19.88 49.33,19.88
GND on BOTTOM (solid shape): 4.8,-23.9 2.59,-23.9 2.59,-21.55 4.8,-21.55
GND on BOTTOM (solid shape): 8.28,12.74 2.24,12.74 2.24,14.75 8.28,14.75
GND on BOTTOM (solid shape): 24.62,15.9 22.75,15.9 22.75,16.81 24.62,16.81
GND on BOTTOM (solid shape): 28.27,-28.08 26.93,-28.08 26.93,-27.12 28.27,-27.12
GND on BOTTOM (solid shape): 82.95,-13.85 80.08,-13.85 80.08,-13.05 82.95,-13.05
GND on BOTTOM (solid shape): 86.5,-30.47 83.5,-30.47 83.5,-25.1 86.5,-25.1
GND on BOTTOM (solid shape): 87.9,5.15 85.4,5.15 85.4,9.67 87.9,9.67
GND on BOTTOM (solid shape): 30.3,18.52 30.3,17.91 29.45,17.91 29.45,20.4 30.3,20.4
GND on BOTTOM (solid shape): 17.4,-26.94 18.36,-27.9 18.95,-27.9 18.95,-30.4 17.45,-30.4 17.45,-28.6 16.8,-27.95 16.8,-25.5 17.4,-25.5
GND on BOTTOM (solid shape): 22.78,20 21.95,19.17 21.62,19.17 21.35,18.9 20,18.9 20,20.55 22.78,20.55
GND on BOTTOM (solid shape): 13.8,25.3 12.6,25.3 12.6,26.7 10.3,26.7 10.3,24.75 11.1,24.75 11.1,23.4 9.45,23.4 9.45,27.9 13.8,27.9
GND on BOTTOM (solid shape): 34,25.3 32.75,25.3 32.75,26.85 30.3,26.85 30.3,24.75 31.1,24.75 31.1,23.4 29.45,23.4 29.45,27.9 34,27.9
GND on BOTTOM (solid shape): 10.95,-27.6 10.45,-28.1 10.45,-30.4 8.45,-30.4 8.45,-28.6 9.21,-28.6 9.95,-27.87 9.95,-26.88 8.6,-26.88 8.6,-26.17 9.95,-26.17 9.95,-25.43 10.95,-25.43
P1V8 on TOP (solid shape): 70.2,-12.6 69.5,-13.3 68,-13.3 68,-11.1 70.2,-11.1
P1V8 on TOP (solid shape): 69.6,22.35 68.95,22.35 68.95,21.7 67.2,21.7 67.2,24.22 69.6,24.22
P1V8 on TOP (solid shape): 75.1,15.37 77.15,15.37 77.15,14.06 74.8,14.06 74.8,15.85 75.1,15.85
P1V8 on TOP (solid shape): 78.8,21.7 75.45,21.7 75.45,22 76.51,22 76.51,24.12 78.8,24.12
P1V8 on TOP (solid shape): 55.8,-12.75 58.42,-12.75 59.64,-11.53 59.64,-11.25 60.8,-11.25 60.8,-12.15 59.64,-12.15 58.6,-13.19 58.6,-14.25 56.8,-14.25 56.25,-14.8 52.8,-14.8 51.67,-15.92 51.67,-16.55 51.42,-16.55 51.42,-15.66 52.8,-14.28 52.8,-8.8 55.8,-8.8
P1V8 on TOP (solid shape): 60.62,25.58 60.08,25.58 60.08,23.38 57.45,23.38 57.2,23.13 57.2,20.95 58.1,20.05 58.1,19.04 58.44,18.7 59.6,18.7 59.6,17.9 58.4,17.9 57.75,18.55 56.3,18.55 56.3,20.25 56,20.55 54.69,20.55 53.67,19.53 53.67,19.05 53.42,19.05 53.42,20.04 54.2,20.81 54.2,26.8 57.2,26.8 57.78,27.38 60.62,27.38
P1V8 on BOTTOM (solid shape): 77.95,21.81 76.51,21.81 76.51,24.12 77.95,24.12
P3V3 on TOP (solid shape): 85.09,-19.6 80.7,-19.6 80.7,-18.8 85.09,-18.8
P3V3 on BOTTOM (solid shape): 8.28,20.36 2.24,20.36 2.24,22.75 8.28,22.75
P3V3 on BOTTOM (solid shape): 8.28,7.23 2.24,7.23 2.24,9.67 8.28,9.67
P3V3 on BOTTOM (solid shape): 82.95,-12.6 80.08,-12.6 80.08,-11.8 82.95,-11.8
P3V3 on BOTTOM (solid shape): 45.06,-22.03 43.74,-22.03 43.74,-19.95 45.06,-19.95
P3V3 on BOTTOM (solid shape): 84.1,6.25 81.7,6.25 80.32,6.26 80.32,8.02 81.7,8.02 81.7,9.67 84.1,9.67
P3V3 on BOTTOM (solid shape): 13.9,-28.6 15.65,-28.6 15.65,-30.4 11.7,-30.4 11.7,-27.7 11.4,-27.4 11.4,-27.08 12.38,-27.08
P3V3 on BOTTOM (solid shape): 20.28,5.07 22.2,5.07 22.2,3.12 18.3,3.12 18.3,5.71 17.95,6.06 17.95,6.6 18.75,6.6
P3V3 on VCC (solid shape): 45.06,-29.4 44.77,-30.11 44.06,-30.4 11.75,-30.4 11.75,-27.56 14.94,-27.56 15.42,-27.07 15.42,-23.82 14.78,-23.17 12.69,-23.17 12.54,-23.02 12.54,-22.44 12.74,-22.24 15.49,-22.24 16.36,-23.11 16.36,-28.39 17.24,-29.27 42.74,-29.27 43.45,-28.97 43.74,-28.27 43.74,-20.85 45.06,-20.85
LDO22 on BOTTOM (solid shape): 27.32,17.48 23.32,17.48 23.32,18.6 27.32,18.6
LDO22 on BOTTOM (solid shape): 27.78,13.39 25.86,13.39 25.86,14.3 27.78,14.3
LDO22-1 on BOTTOM (solid shape): 22.72,17.48 20.48,17.48 20.48,18.44 22.72,18.44
LDO22-1 on BOTTOM (solid shape): 13.3,22.38 11.94,22.38 11.1,21.54 11.1,21.2 9.7,21.2 9.7,22.4 11.1,22.4 11.32,22.62 13.3,22.62
LDO22-2 on BOTTOM (solid shape): 33.5,22.38 31.56,22.38 31.1,21.92 31.1,21.2 29.09,21.2 28.52,20.63 28.52,17.64 27.92,17.64 27.92,20.87 29.45,22.4 31.1,22.4 31.32,22.62 33.5,22.62
VCAP on BOTTOM (solid shape): 22.15,15.78 21.58,15.78 21.58,14.54 20.46,14.54 20.46,15.78 20.31,15.78 20.31,16.73 22.15,16.73
VCAP on BOTTOM (solid shape): 30.22,15.94 29.98,15.94 29.98,14.54 28.8,14.54 28.8,15.94 28.35,15.94 28.35,16.9 30.22,16.9
VCAP on BOTTOM (solid shape): 15.95,10.57 14.13,10.57 14.13,8.92 14.81,8.25 15.95,8.25 15.95,7.7 11.05,7.7 11.05,9.05 11.88,9.05 12.35,9.52 12.35,11.32 15.95,11.32
VCAP on BOTTOM (solid shape): 9.4,-23.1 8.32,-23.1 7.75,-23.67 7.75,-24.88 8.3,-25.43 9.4,-25.43 9.4,-25.98 4.5,-25.98 4.5,-24.88 5.07,-24.88 5.8,-24.14 5.8,-22.5 9.4,-22.5
VCAP1 on BOTTOM (solid shape): 17.1,21.88 17.1,20.94 17.74,20.3 19,20.3 19,18.9 19.71,18.19 19.71,15.94 18.86,15.94 18,15.07 18,13.36 14.82,13.36 14.82,16.73 15.86,16.73 17.12,17.99 17.12,19.45 16.67,19.9 15.4,19.9 15.4,20.5 16.2,20.5 16.52,20.82 16.52,22.11 16.25,22.38 15.4,22.38 15.4,22.62 16.36,22.62
VCAP2 on BOTTOM (solid shape): 37.64,21.65 37.64,20.68 38.01,20.3 39.4,20.3 39.4,18.9 39.01,18.9 35.81,15.71 35.81,13.41 32.81,13.41 32.81,15.93 30.82,15.93 30.82,16.82 32.57,16.82 33.26,17.51 36.5,17.51 37.2,18.21 37.2,19.9 35.6,19.9 35.6,20.5 36.49,20.5 36.87,20.87 36.87,21.95 36.44,22.38 35.6,22.38 35.6,22.62 36.66,22.62
N478267 on BOTTOM (solid shape): 20.5,25.68 17.75,25.68 16.2,24.12 16.2,23.88 15.4,23.88 15.4,24.7 14.8,25.3 14.8,26.85 20.5,26.85
N478271 on BOTTOM (solid shape): 19.62,22.32 20.5,22.32 20.5,21.27 18.3,21.27 18.3,21.55 16.47,23.38 15.4,23.38 15.4,23.62 18.32,23.62
N478287 on BOTTOM (solid shape): 9.4,-27.61 8.36,-27.61 6.7,-29.27 6.7,-30.33 4.5,-30.33 4.5,-29.27 6.07,-29.27 8.27,-27.08 9.4,-27.08
N478287 on BOTTOM (solid shape): 15.95,6.06 14.92,6.06 13.25,4.4 13.25,3.35 11.05,3.35 11.05,4.4 12.32,4.4 14.52,6.6 15.95,6.6
N478345 on BOTTOM (solid shape): 13.3,21.88 12.83,21.88 11.67,20.71 11.67,20.36 11.5,20.19 11.5,19.19 11.85,18.84 14.95,18.84 15.4,19.29 15.4,19.3 16.2,19.3 16.2,19.3 16.2,18.55 11.4,18.55 10.9,19.05 10.9,20.4 10.98,20.4 11.35,20.76 11.35,20.97 12.5,22.12 13.3,22.12
N478369 on BOTTOM (solid shape): 11.96,25.74 11.96,24.63 12.47,24.12 13.3,24.12 13.3,23.88 12.25,23.88 11.69,24.43 11.69,25.21 11.5,25.4 10.9,25.4 10.9,26.2 11.5,26.2
N478385 on BOTTOM (solid shape): 16.2,21.88 15.71,21.88 14.5,20.67 14.5,19.6 13.9,19.6 13.9,20.53 15.4,22.03 15.4,22.12 16.2,22.12
N485107 on BOTTOM (solid shape): 40.7,25.68 37.78,25.68 36.4,24.29 36.4,23.88 35.6,23.88 35.6,24.7 35,25.3 35,26.85 40.7,26.85
N485115 on BOTTOM (solid shape): 40.7,22.32 40.7,21.27 38.5,21.27 38.5,22.32 37.45,23.38 35.6,23.38 35.6,23.62 39.4,23.62
N485373 on BOTTOM (solid shape): 33.5,21.88 32.98,21.88 31.5,20.4 31.5,19.12 31.73,18.89 35.19,18.89 35.6,19.3 36.4,19.3 36.4,18.55 31.36,18.55 30.9,19.01 30.9,20.4 30.98,20.4 32.7,22.12 33.5,22.12
N485445 on BOTTOM (solid shape): 32.21,25.49 32.21,24.88 32.44,24.65 33.5,24.65 33.5,23.88 32.57,23.88 31.86,24.59 31.86,24.93 31.39,25.4 30.9,25.4 30.9,26.2 31.5,26.2
N485483 on BOTTOM (solid shape): 36.4,21.88 35.97,21.88 34.7,20.6 34.7,19.6 34.1,19.6 34.1,20.66 34.36,20.66 35.6,21.9 35.6,22.12 36.4,22.12
N490465 on BOTTOM (solid shape): 23.75,13.39 22.75,13.39 22.75,14.95 23.75,14.95
N490915 on BOTTOM (solid shape): 27.6,14.6 26.6,14.6 26.6,15.6 27.6,15.6
N491611 on TOP (solid shape): 51.54,19.27 52.65,19.27 52.65,18.52 50.92,18.52 50.58,18.18 50.58,17.38 50.03,17.38 50.03,19.88 50.93,19.88
N491611 on TOP (solid shape): 49.91,-16.33 50.65,-16.33 50.65,-17.08 49.05,-17.08 48.8,-17.33 48.8,-19.3 45.7,-19.3 45.7,-18.8 47.86,-18.8 48.2,-18.46 48.2,-17.29 48.25,-17.24 48.25,-15.7 49.28,-15.7
N491611 on BOTTOM (solid shape): 48.8,-19.3 43.84,-19.3 43.84,-18.28 48.8,-18.28
N492211 on TOP (solid shape): 49.5,-13.98 51.17,-15.66 51.17,-16.55 50.92,-16.55 50.92,-15.85 49.88,-14.8 46.5,-14.8 46.5,-8.8 49.5,-8.8
N492211 on TOP (solid shape): 50.9,22.32 53.17,20.04 53.17,19.05 52.92,19.05 52.92,19.54 51.91,20.55 47.9,20.55 47.9,26.8 50.9,26.8

Small or netless copper shapes (teardrops, artwork), in the pictures only: 3 on TOP

## Text on the board
Ref Des/Silkscreen Bottom: LDO22 | EXCLUSIVE | PHOTOVOLTAIC | ENERGY HARVESTER | GLPP2024-PSU-A1 | NO BUGS PERMANENTLY | NO POLARITY PROTECTION | WARNING
Ref Des/Silkscreen Top: ENERGY HARVESTER | PHOTOVOLTAIC | GLPP2024-PSU-A1
XSECTION_CHART: *  SURFACE | L1 TOP CONDUCTOR | *  DIELECTRIC | L2 GND CONDUCTOR | L3 VCC CONDUCTOR | L4 BOTTOM CONDUCTOR | DESIGN CROSS SECTION CHART | ___________________________ | TOTAL THICKNESS 1.0212 MM | 1-4
DIMENSION: 4 LAYERS PCB STACK, 1.0mm THINKNESS, NO IMPEDANCE MATCH DEMAND. | ANY QUESTIONS PLEASE CONTACT ME: +8613522296239 | FIGURE | FINISHED_SIZE | 0.15 | 0.2 | 0.9 | 1.0 | 1.2 | 1.8 | 3.0 | DRILL CHART: TOP to BOTTOM | ALL UNITS ARE IN MILLIMETERS | PLATED | NON-PLATED | QTY | 43 | 197 | 2 | 4 | 3
